# Altium PCB Standard 60 03.PcbDoc
Units mm, origin at the board's own origin, x right, y up, seen from the top; angles counter-clockwise.
Board outline 283.39 x 94.93 mm, 2 copper layers (Top Layer, Bottom Layer); 138 components, 95 nets, 541 pads, 27 vias.
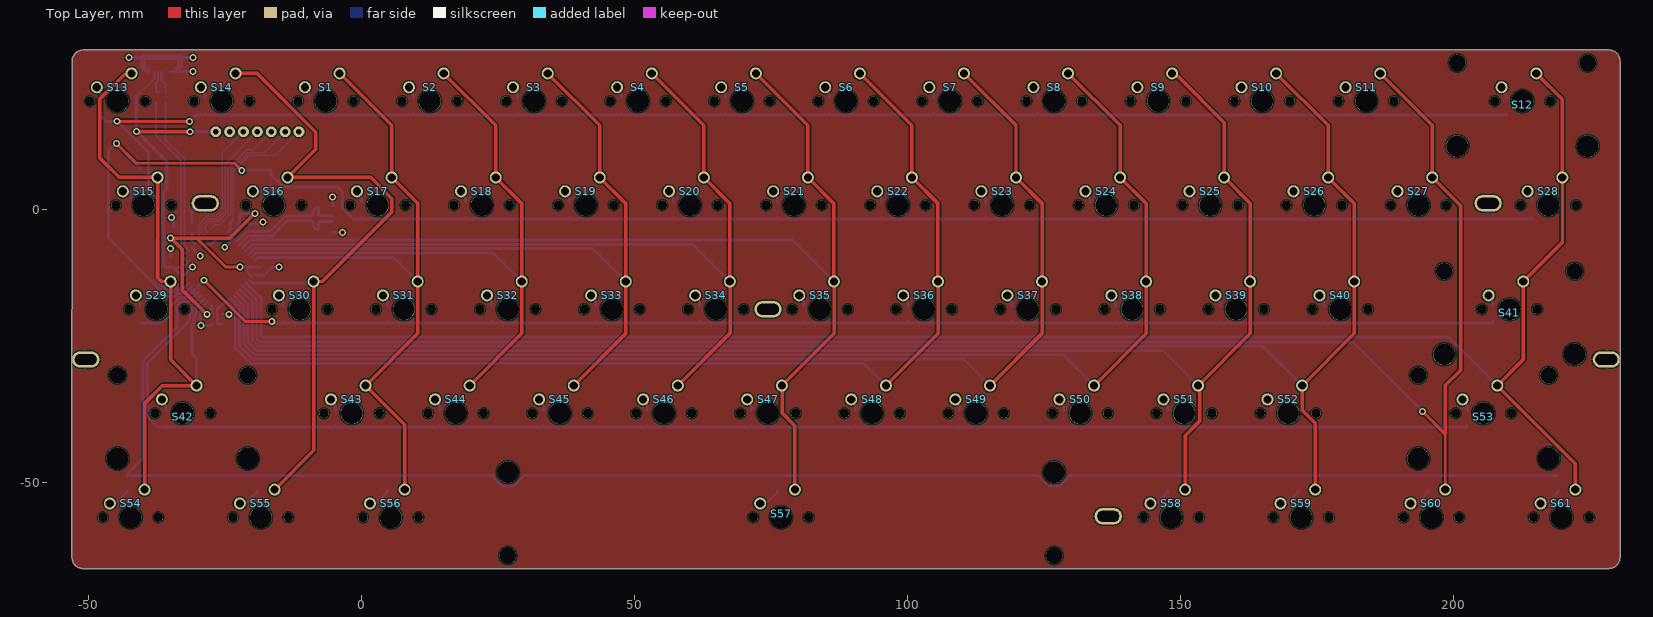
[diagram p0: Top Layer view]
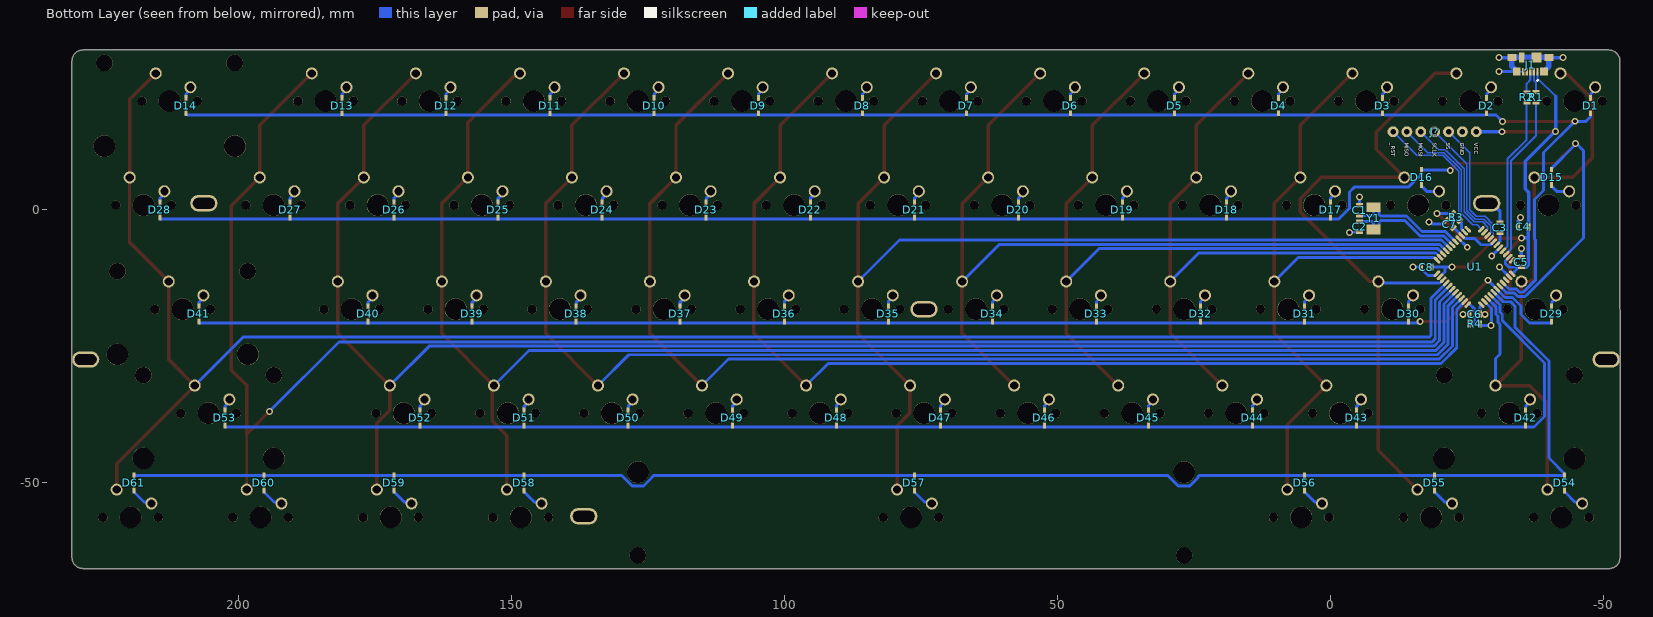
[diagram p1: Bottom Layer view, seen from below]

## Layer stack, top to bottom
Top Solder: solder mask 0.0102, Solder Resist, Dk 3.5
Top Layer: signal copper 0.0356
Dielectric 1: dielectric 0.32, FR-4, Dk 4.8
Bottom Layer: signal copper 0.0356
Bottom Solder: solder mask 0.0102, Solder Resist, Dk 3.5

## Board outline
-50.982,-65.677 cw(c-50.982,-63.677) -52.982,-63.676 -52.963,27.255 cw(c-50.963,27.254) -50.963,29.254 228.411,29.254 cw(c228.411,27.254) 230.411,27.254 230.411,-63.672 cw(c228.411,-63.672) 228.411,-65.672

## Design rules (kind name [scope] priority, off if disabled: settings)
Clearance [All] p1: gap=0.254 ignorepadtopadclearanceinfootprint=TRUE
ComponentClearance [All] p1: gap=0.254 collisioncheckmode=3 verticalgap=0.254 showdistances=FALSE donotcheckwithout3dbody=TRUE checkcomponentboundary=TRUE
DiffPairsRouting [All] p1: maxlimit=2.54 minlimit=0.254 mostfreqgap=0.381 toplayer_minwidth=0.254 toplayer_maxwidth=2.54 toplayer_prefwidth=0.381 bottomlayer_minwidth=0.254 bottomlayer_maxwidth=2.54 bottomlayer_prefwidth=0.381 maxuncoupledlength=12.7
PolygonConnect [All] p1: connectstyle=Relief reliefconductorwidth=0.254 reliefentries=4 polygonreliefangle="90 Angle" airgapwidth=0.254
RoutingVias [All] p1: holewidth=0.7 width=1.2 viastyle="Through Hole" minholewidth=0.5 minwidth=1 maxholewidth=1 maxwidth=1.5
SolderMaskExpansion [All] p1: expansion=0.102 istentingtop=FALSE
Width [All] p1: maxlimit=25.4 minlimit=0.254 preferedwidth=0.635
28 further rules are at their usual default settings.

## Classes and differential pairs
net class ROW[5..1]: ROW1 ROW2 ROW3 ROW4 ROW5
net class COL[14..1]: COL1 COL2 COL3 COL4 COL5 COL6 COL7 COL8 COL9 COL10 COL11 COL12 COL13 COL14
component class MCU: C1 C2 C3 C4 C5 C6 C7 C8 J1 J? R1 R2 R3 R4 U1 Y1
component class matrix: D1 D2 D3 D4 D5 D6 D7 D8 D9 D10 D11 D12 D13 D14 D15 D16 D17 D18 D19 D20 D21 D22 D23 D24 D25 D26 D27 D28 D29 D30 D31 D32 D33 D34 D35 D36 D37 D38 D39 D40 D41 D42 D43 D44 D45 D46 D47 D48 D49 D50 D51 D52 D53 D54 D55 D56 D57 D58 D59 D60 D61 S1 S2 S3 S4 S5 S6 S7 S8 S9 S10 S11 S12 S13 S14 S15 S16 S17 S18 S19 S20 S21 S22 S23 S24 S25 S26 S27 S28 S29 S30 S31 S32 S33 S34 S35 S36 S37 S38 S39 S40 S41 S42 S43 S44 S45 S46 S47 S48 S49 S50 S51 S52 S53 S54 S55 S56 S57 S58 S59 S60 S61
differential pair XT: +XT_P -XT_N
differential pair DP: +DP_P -DP_N
differential pair DP1: +DP1_P -DP1_N

## Components (designator, comment, footprint, x,y, rotation, side; value= is the part's Value field where it differs from the comment)
C1 "Cap" 0805 -5.323,-0.064 r270 bottom value=22pf
C2 "Cap" 0805 -5.323,-3.112 r90 bottom value=22pf
C3 "Cap" 0805 -31.011,-3.304 r270 bottom value=1uf
C4 "Cap" 0805 -35.286,-3.12 r180 bottom value=10uf
C5 "Cap" 0805 -34.946,-9.566 r270 bottom value=0.1uf
C6 "Cap" 0805 -26.387,-19.129 r180 bottom value=0.1uf
C7 "Cap" 0805 -21.797,-2.631 r225 bottom value=0.1uf
C8 "Cap" 0805 -17.504,-10.48 r180 bottom value=0.1uf
D1 "Diode" SOD-323F -47.625,19.05 r90 bottom
D2 "Diode" SOD-323F -28.575,19.05 r90 bottom
D3 "Diode" SOD-323F -9.525,19.05 r90 bottom
D4 "Diode" SOD-323F 9.525,19.05 r90 bottom
D5 "Diode" SOD-323F 28.575,19.05 r90 bottom
D6 "Diode" SOD-323F 47.625,19.05 r90 bottom
D7 "Diode" SOD-323F 66.675,19.05 r90 bottom
D8 "Diode" SOD-323F 85.725,19.05 r90 bottom
D9 "Diode" SOD-323F 104.775,19.05 r90 bottom
D10 "Diode" SOD-323F 123.825,19.05 r90 bottom
D11 "Diode" SOD-323F 142.875,19.05 r90 bottom
D12 "Diode" SOD-323F 161.925,19.05 r90 bottom
D13 "Diode" SOD-323F 180.975,19.05 r90 bottom
D14 "Diode" SOD-323F 209.55,19.05 r90 bottom
D15 "Diode" SOD-323F -40.481,5.953 r270 bottom
D16 "Diode" SOD-323F -16.669,5.953 r270 bottom
D17 "Diode" SOD-323F 0,0 r90 bottom
D18 "Diode" SOD-323F 19.05,0 r90 bottom
D19 "Diode" SOD-323F 38.1,0 r90 bottom
D20 "Diode" SOD-323F 57.15,0 r90 bottom
D21 "Diode" SOD-323F 76.2,0 r90 bottom
D22 "Diode" SOD-323F 95.25,0 r90 bottom
D23 "Diode" SOD-323F 114.3,0 r90 bottom
D24 "Diode" SOD-323F 133.35,0 r90 bottom
D25 "Diode" SOD-323F 152.4,0 r90 bottom
D26 "Diode" SOD-323F 171.45,0 r90 bottom
D27 "Diode" SOD-323F 190.5,0 r90 bottom
D28 "Diode" SOD-323F 214.312,0 r90 bottom
D29 "Diode" SOD-323F -40.481,-19.05 r90 bottom
D30 "Diode" SOD-323F -14.287,-19.05 r90 bottom
D31 "Diode" SOD-323F 4.763,-19.05 r90 bottom
D32 "Diode" SOD-323F 23.812,-19.05 r90 bottom
D33 "Diode" SOD-323F 42.863,-19.05 r90 bottom
D34 "Diode" SOD-323F 61.913,-19.05 r90 bottom
D35 "Diode" SOD-323F 80.963,-19.05 r90 bottom
D36 "Diode" SOD-323F 100.013,-19.05 r90 bottom
D37 "Diode" SOD-323F 119.062,-19.05 r90 bottom
D38 "Diode" SOD-323F 138.112,-19.05 r90 bottom
D39 "Diode" SOD-323F 157.162,-19.05 r90 bottom
D40 "Diode" SOD-323F 176.213,-19.05 r90 bottom
D41 "Diode" SOD-323F 207.169,-19.05 r90 bottom
D42 "Diode" SOD-323F -35.719,-38.1 r90 bottom
D43 "Diode" SOD-323F -4.763,-38.1 r90 bottom
D44 "Diode" SOD-323F 14.287,-38.1 r90 bottom
D45 "Diode" SOD-323F 33.337,-38.1 r90 bottom
D46 "Diode" SOD-323F 52.388,-38.1 r90 bottom
D47 "Diode" SOD-323F 71.438,-38.1 r90 bottom
D48 "Diode" SOD-323F 90.488,-38.1 r90 bottom
D49 "Diode" SOD-323F 109.537,-38.1 r90 bottom
D50 "Diode" SOD-323F 128.588,-38.1 r90 bottom
D51 "Diode" SOD-323F 147.637,-38.1 r90 bottom
D52 "Diode" SOD-323F 166.688,-38.1 r90 bottom
D53 "Diode" SOD-323F 202.406,-38.1 r90 bottom
D54 "Diode" SOD-323F -42.862,-50.006 r270 bottom
D55 "Diode" SOD-323F -19.05,-50.006 r270 bottom
D56 "Diode" SOD-323F 4.763,-50.006 r270 bottom
D57 "Diode" SOD-323F 76.2,-50.006 r270 bottom
D58 "Diode" SOD-323F 147.637,-50.006 r270 bottom
D59 "Diode" SOD-323F 171.45,-50.006 r270 bottom
D60 "Diode" SOD-323F 195.262,-50.006 r270 bottom
D61 "Diode" SOD-323F 219.075,-50.006 r270 bottom
J1 "Molex 473460001" "MOLEX 47346 0001" -36.575,27.541 r0 bottom locked
J? "ISP HEADER" "SPI HEADER" -26.67,14.287 r270 bottom
R1 "Res" 0805 -37.626,20.589 r270 bottom value=22
R2 "Res" 0805 -35.931,20.572 r270 bottom value=22
R3 "Res" 0805 -23.005,-1.33 r225 bottom value=10k
R4 "Res" 0805 -26.387,-20.907 r180 bottom value=10k
S1 "1u" MX1U -6.526,19.893 r0 top locked
S2 "1u" MX1U 12.523,19.893 r0 top locked
S3 "1u" MX1U 31.574,19.893 r0 top locked
S4 "1u" MX1U 50.624,19.893 r0 top locked
S5 "1u" MX1U 69.674,19.893 r0 top locked
S6 "1u" MX1U 88.724,19.893 r0 top locked
S7 "1u" MX1U 107.773,19.893 r0 top locked
S8 "1u" MX1U 126.824,19.893 r0 top locked
S9 "1u" MX1U 145.873,19.893 r0 top locked
S10 "1u" MX1U 164.924,19.893 r0 top locked
S11 "1u" MX1U 183.974,19.893 r0 top locked
S12 "2u" MX2U 212.548,19.893 r0 top locked
S13 "1u" MX1U -44.626,19.893 r0 top locked
S14 "1u" MX1U -25.576,19.893 r0 top locked
S15 "1u" MX1U -39.863,0.843 r0 top locked
S16 "1u" MX1U -16.052,0.843 r0 top locked
S17 "1u" MX1U 2.999,0.843 r0 top locked
S18 "1u" MX1U 22.049,0.843 r0 top locked
S19 "1u" MX1U 41.099,0.843 r0 top locked
S20 "1u" MX1U 60.148,0.843 r0 top locked
S21 "1u" MX1U 79.199,0.843 r0 top locked
S22 "1u" MX1U 98.248,0.843 r0 top locked
S23 "1u" MX1U 117.299,0.843 r0 top locked
S24 "1u" MX1U 136.349,0.843 r0 top locked
S25 "1u" MX1U 155.398,0.843 r0 top locked
S26 "1u" MX1U 174.449,0.843 r0 top locked
S27 "1u" MX1U 193.498,0.843 r0 top locked
S28 "1u" MX1U 217.31,0.843 r0 top locked
S29 "1u" MX1U -37.482,-18.208 r0 top locked
S30 "1u" MX1U -11.288,-18.208 r0 top locked
S31 "1u" MX1U 7.76,-18.208 r0 top locked
S32 "1u" MX1U 26.81,-18.208 r0 top locked
S33 "1u" MX1U 45.861,-18.208 r0 top locked
S34 "1u" MX1U 64.91,-18.208 r0 top locked
S35 "1u" MX1U 83.96,-18.208 r0 top locked
S36 "1u" MX1U 103.01,-18.208 r0 top locked
S37 "1u" MX1U 122.062,-18.208 r0 top locked
S38 "1u" MX1U 141.11,-18.208 r0 top locked
S39 "1u" MX1U 160.162,-18.208 r0 top locked
S40 "1u" MX1U 179.212,-18.208 r0 top locked
S41 "2u" MX2U 210.166,-18.208 r0 top locked
S42 "2u" MX2U -32.721,-37.257 r0 top locked
S43 "1u" MX1U -1.763,-37.257 r0 top locked
S44 "1u" MX1U 17.287,-37.257 r0 top locked
S45 "1u" MX1U 36.337,-37.257 r0 top locked
S46 "1u" MX1U 55.385,-37.257 r0 top locked
S47 "1u" MX1U 74.437,-37.257 r0 top locked
S48 "1u" MX1U 93.485,-37.257 r0 top locked
S49 "1u" MX1U 112.537,-37.257 r0 top locked
S50 "1u" MX1U 131.587,-37.257 r0 top locked
S51 "1u" MX1U 150.635,-37.257 r0 top locked
S52 "1u" MX1U 169.687,-37.257 r0 top locked
S53 "2u" MX2U 205.404,-37.257 r0 top locked
S54 "1u" MX1U -42.245,-56.307 r0 top locked
S55 "1u" MX1U -18.433,-56.307 r0 top locked
S56 "1u" MX1U 5.38,-56.307 r0 top locked
S57 "6.25u" "MX6.25U FLIPPED STAB" 76.818,-56.307 r0 top locked
S58 "1u" MX1U 148.254,-56.307 r0 top locked
S59 "1u" MX1U 172.068,-56.307 r0 top locked
S60 "1u" MX1U 195.879,-56.307 r0 top locked
S61 "1u" MX1U 219.692,-56.307 r0 top locked
U1 "ATmega32U4" TQFP44 -26.366,-10.462 r315 bottom locked
Y1 "XTAL" ABM3 -7.863,-1.588 r270 bottom value=16MHz

## Footprints (in the part's own frame and the unit in brackets; to place one, negate y for a bottom-side part, rotate by r counter-clockwise, add the part's x,y. Pads: shape width x height; smd on the part's side, far side on the other; paste and mask are expansions set on the pad)
0805 [mil]
  rect 28x51 smd: 1(-37.5,0) 2(37.5,0)
ABM3 [mil] "ABRACON SMD XTAL PACKAGE"
  rect 70x100 smd: 1(-80,0) 2(80,0)
"MOLEX 47346 0001" [mm]
  rect 0.45x1.38 smd paste+0 mask+0: 1(-1.3,2.31) 2(-0.65,2.31) 3(0,2.31) 4(0.65,2.31) 5(1.3,2.31)
  rect 1.425x1.55 smd paste+0 mask+0: 6(-2.488,2.225) 7(2.488,2.225)
  rect 1.65x1.3 smd paste+0 mask+0: 8(-3.375,-0.35) 11(3.375,-0.35)
  rect 1.8x1.9 smd paste+0 mask+0: 9(-1.15,-0.35)
  rect 1x1.9 smd paste+0 mask+0: 10(1.55,-0.35)
  silkscreen extent -1.45,3.73 -1.2,3.97
MX1U [mm]
  round 2.2 hole 1.5: 1(2.54,5.08) 2(-3.81,2.54)
  round 1.7 hole 1.7 unplated: ""(-5.08,0) ""(5.08,0)
  round 4 hole 4 unplated: ""(0,0)
MX2U [mil]
  round 86.61 hole 59.06: 1(100,200) 2(-150,100)
  round 157 hole 157 unplated: ""(-470,-325) ""(470,-325)
  round 120 hole 120 unplated: ""(-470,275) ""(470,275)
  round 66.93 hole 66.93 unplated: ""(-200,0) ""(200,0)
  round 157.48 hole 157.48 unplated: ""(0,0)
"MX6.25U FLIPPED STAB" [mm]
  round 2.2 hole 1.5: 1(2.54,5.08) 2(-3.81,2.54)
  round 3.048 hole 3.048 unplated: ""(-50,-6.985) ""(50,-6.985)
  round 3.988 hole 3.988 unplated: ""(-50,8.255) ""(50,8.255)
  round 1.7 hole 1.7 unplated: ""(-5.08,0) ""(5.08,0)
  round 4 hole 4 unplated: ""(0,0)
SOD-323F [mm]
  rect 1.05x0.55 smd: 1(-1.4,0) 2(1.4,0)
"SPI HEADER" [mm]
  round 2 hole 1: 1(0,0) 2(0,-2.54) 3(0,-5.08) 4(0,-7.62) 5(0,-10.16) 6(0,-12.7) 7(0,-15.24)
TQFP44 [mm] "TQFP, 44-Leads, Body 10.00x10.00mm"
  oval 1.5x0.55 smd: 1(-5.75,4) 2(-5.75,3.2) 3(-5.75,2.4) 4(-5.75,1.6) 5(-5.75,0.8) 6(-5.75,0) 7(-5.75,-0.8) 8(-5.75,-1.6) 9(-5.75,-2.4) 10(-5.75,-3.2) 11(-5.75,-4) 23(5.75,-4) 24(5.75,-3.2) 25(5.75,-2.4) 26(5.75,-1.6) 27(5.75,-0.8) 28(5.75,0) 29(5.75,0.8) 30(5.75,1.6) 31(5.75,2.4) 32(5.75,3.2) 33(5.75,4)
  oval 0.55x1.5 smd: 12(-4,-5.75) 13(-3.2,-5.75) 14(-2.4,-5.75) 15(-1.6,-5.75) 16(-0.8,-5.75) 17(0,-5.75) 18(0.8,-5.75) 19(1.6,-5.75) 20(2.4,-5.75) 21(3.2,-5.75) 22(4,-5.75) 34(4,5.75) 35(3.2,5.75) 36(2.4,5.75) 37(1.6,5.75) 38(0.8,5.75) 39(0,5.75) 40(-0.8,5.75) 41(-1.6,5.75) 42(-2.4,5.75) 43(-3.2,5.75) 44(-4,5.75)
  silkscreen extent -5.87,4.7 -5.63,4.95

## Part data
C1 C2 C3 C4 C5 C6 C7 C8: "Capacitor"
J1: "Micro usb receptacle"
R1 R2 R3 R4: "Resistor"
  R1: LatestRevisionDate=17-Jul-2002, LatestRevisionNote="Re-released for DXP Platform.", PackageDescription="Axial Device, Thru-Hole; 2 Leads; 0.4 in Pin Spacing", PackageReference=AXIAL-0.4, Published=8-Jun-2000, Publisher="Altium Limited"
S1 S2 S3 S4 S5 S6 S7 S8 S9 S10 S11 S13 S14 S15 S16 S17 S18 S19 S20 S21 S22 S23 S24 S25 S26 S27 S28 S29 S30 S31 S32 S33 S34 S35 S36 S37 S38 S39 S40 S43 S44 S45 S46 S47 S48 S49 S50 S51 S52 S54 S55 S56 S58 S59 S60 S61: "1-2u Mx Switch"
S12 S41 S42 S53: "2-3u Mx Switch with pcb mount stabs"
S57: "6.25u Mx Switch with pcb mount stabs"
U1: "8-bit AVR Microcontroller", Manufacturer="Microchip / Atmel", Manufacturer Part Number=ATMEGA32U4-AU, ComponentLink1Description="Manufacturer URL", ComponentLink1URL=http://www.atmel.com/, ComponentLink2Description="ATmega16U4/32U4 Datasheet", ComponentLink2URL=http://www.atmel.com/dyn/resources/prod_documents/doc7766.pdf, ComponentLink3Description="ATmega16U4 ATmega32U4 Summary", ComponentLink3URL=http://www.atmel.com/dyn/resources/prod_documents/7766S.pdf, DatasheetVersion="revF, Nov-2010", PackageDescription="44-Pin Plastic Thin Quad Flat Pack, 10 x 10 x 1.0 mm Body, 0.8 mm Pitch (TQFP)", PackageReference=44ML, PackageVersion="rev.G, Jul-2007", RevisionNote="DatasheetVersion updated. URLs added."
Y1: "Crystal Oscillator"

## Free pads (board coordinates)
  oval 5x3 hole 2 slot 4 at 0 deg: 3(206.274,1.191) 4(227.911,-27.407) 5(136.723,-56.108) 6(74.436,-18.21) 7(-50.463,-27.408) 8(-28.575,1.191)

## Via types
v1: diameter 1.27, hole 0.711, Top Layer to Bottom Layer, 27 vias

## Nets (pads, with @x,y where several pads share a name; then routed paths per layer and width w, separated by ;. In a path a pad name is that pad's centre, name@x,y a point inside that pad or via, vN(x,y) a via of type N, cw(c..) or ccw(c..) an arc to the next point about the centre after c; other vN are vias at no path point)
\R\E\S\E\T\: J?.7 R3.2 U1.13 | length 26.7
  Bottom Layer w0.254: R3.2@-23.739,-2.029 -23.419,-1.709 -23.419,-0.611 -23.422,-0.608 -23.422,7.079 -20.537,9.964 -15.753,9.964 J?.7
  Bottom Layer w0.533: U1.13@-24.527,-4.098 -24.527,-4.094 -24.218,-3.785 -24.218,-3.783 -23.996,-3.562 -23.996,-2.321 -23.742,-2.066 R3.2
COL1: S13.1 S15.1 S29.1 S42.1 S54.1 U1.36 | length 116.4
  Top Layer w0.635: S13.1 -42.354,24.705 -43.451,24.705 -47.879,20.277 -47.879,9.478 -44.323,5.923 S15.1 -37.323,1.939 -37.292,1.908 -37.292,-12.418 -36.582,-13.128 S29.1 ; S54.1 -39.705,-35.457 -36.426,-32.177 S42.1 -34.91,-27.448 S29.1@-34.91,-13.16
  Bottom Layer w0.533: S42.1 -30.181,-27.25 -31.001,-26.43 -31.001,-20.972 -30.632,-20.604 -30.632,-19.491 -30.291,-19.149 -30.244,-19.102 -30.244,-18.277 -30.244,-17.735 U1.36
COL2: S14.1 S16.1 S30.1 S55.1 U1.25 | length 125.6
  Top Layer w0.635: S14.1 -19.107,24.973 -8.364,14.23 -8.364,11.07 -13.297,6.138 S16.1 1.68,5.923 5.57,2.032 5.57,-0.399 -7.159,-13.128 S30.1 -8.717,-13.16 -8.717,-44.051 S55.1
  Bottom Layer w0.533: U1.25 -20.037,-13.397 -9.017,-13.397 S30.1
COL3: S1.1 S17.1 S31.1 S43.1 S56.1 U1.22 | length 120.9
  Top Layer w0.635: S1.1 5.539,15.448 S17.1 ; S17.1@5.559,5.943 10.3,1.202 S31.1 10.331,-13.16 10.331,-22.623 S43.1 7.92,-39.32 S56.1
  Bottom Layer w0.533: U1.22 -18.944,-8.698 5.869,-8.698 S31.1
COL4: S2.1 S18.1 S32.1 S44.1 U1.21 | length 118.8
  Top Layer w0.635: S2.1@15.094,24.941 24.589,15.447 S18.1 ; S44.1 29.382,-22.622 29.382,-13.16 S32.1 29.35,1.161 S18.1@24.62,5.891
  Bottom Layer w0.533: U1.21 -19.288,-7.91 24.133,-7.91 S32.1
COL5: S3.1 S19.1 S33.1 S45.1 U1.20 | length 138.8
  Top Layer w0.635: S3.1@34.145,24.941 43.639,15.447 S19.1 ; S45.1 48.432,-22.622 48.432,-13.16 S33.1 48.401,1.161 S19.1@43.67,5.891
  Bottom Layer w0.533: U1.20 -19.632,-7.123 42.395,-7.123 S33.1
COL6: S4.1 S20.1 S34.1 S46.1 U1.19 | length 159
  Top Layer w0.635: S4.1 62.688,15.449 S20.1 67.45,1.16 S34.1 67.482,-13.16 67.482,-22.621 S46.1
  Bottom Layer w0.533: U1.19 -19.976,-6.335 60.658,-6.335 S34.1
COL7: S5.1 S21.1 S35.1 S47.1 S57.1 U1.18 | length 199
  Top Layer w0.635: S5.1 81.739,15.448 S21.1 86.5,1.161 S35.1 86.532,-13.16 86.532,-22.622 S47.1 77.008,-32.209 77.008,-37.194 79.358,-39.544 S57.1
  Bottom Layer w0.533: U1.18 -20.32,-5.548 78.92,-5.548 S35.1
COL8: S6.1 S22.1 S36.1 S48.1 U1.32 | length 198
  Top Layer w0.635: S6.1@91.295,24.941 100.788,15.449 S22.1 ; S48.1 105.582,-22.621 105.582,-13.16 S36.1 105.55,1.16 S22.1@100.819,5.891
  Bottom Layer w0.533: U1.32 -23.101,-18.252 -23.101,-25.238 -20.224,-28.115 91.963,-28.115 S48.1
COL9: S7.1 S23.1 S37.1 S49.1 U1.31 | length 216.6
  Top Layer w0.635: S7.1@110.712,24.68 110.712,24.573 119.839,15.447 S23.1 ; S49.1 124.602,-22.652 124.602,-19.305 124.633,-19.273 124.633,-17.143 124.602,-17.111 S37.1 124.602,1.16 119.892,5.869 S23.1@119.892,6.137
  Bottom Layer w0.533: U1.31 -22.314,-17.908 -22.314,-24.912 -19.898,-27.328 110.227,-27.328 S49.1
COL10: S8.1 S24.1 S38.1 S50.1 U1.30 | length 235.5
  Top Layer w0.635: S8.1@129.395,24.941 138.889,15.448 S24.1 ; S50.1 143.682,-22.622 143.682,-13.16 S38.1 143.65,1.161 S24.1@138.92,5.891
  Bottom Layer w0.533: U1.30 -21.526,-17.564 -21.526,-24.586 -19.572,-26.541 128.49,-26.541 S50.1
COL11: S9.1 S25.1 S39.1 S51.1 S58.1 U1.29 | length 274.8
  Top Layer w0.635: S9.1 148.836,24.973 149.394,24.415 149.488,24.415 157.938,15.966 S25.1 162.702,1.159 S39.1 162.733,-13.16 162.733,-22.62 S51.1 153.439,-32.441 153.439,-38.71 150.794,-41.355 S58.1
  Bottom Layer w0.533: U1.29 -20.739,-17.22 -20.739,-24.26 -19.245,-25.753 146.751,-25.753 S51.1
COL12: S10.1 S26.1 S40.1 S52.1 S59.1 U1.28 | length 292.6
  Top Layer w0.635: S10.1@167.495,24.941 176.989,15.448 S26.1 ; S59.1 174.608,-39.109 172.227,-36.728 S52.1 181.783,-22.621 181.783,-13.16 S40.1 181.752,1.16 S26.1@177.288,5.623
  Bottom Layer w0.533: U1.28 -19.952,-16.876 -19.952,-23.933 -18.919,-24.966 165.015,-24.966 S52.1
COL13: S11.1 S27.1 S60.1 U1.27 | length 319
  Top Layer w0.533: v1(194.242,-36.897) 198.419,-41.074 S60.1
  Top Layer w0.635: S11.1 196.038,15.449 S27.1 201.233,0.728 201.233,-29.344 198.419,-32.157 198.419,-41.074
  Bottom Layer w0.533: U1.27 -19.164,-16.532 -19.164,-23.607 -18.593,-24.178 181.523,-24.178 v1(194.242,-36.897)
COL14: S12.1 S28.1 S41.1 S53.1 S61.1 U1.26 | length 329.9
  Top Layer w0.635: S12.1@215.119,24.941 219.85,20.21 S28.1 219.882,5.891 219.882,-5.952 S41.1 212.737,-13.16 212.737,-27.384 S53.1 222.232,-46.465 S61.1
  Bottom Layer w0.533: U1.26 -18.377,-16.188 -18.377,-23.005 -18.064,-23.318 199.085,-23.318 S53.1
DP1_N: R1.2 U1.3 | length 30
  Bottom Layer w0.381: R1.2 -37.626,13.595 -33.02,8.989 -33.02,-7.202 U1.3
DP1_P: R2.2 U1.4 | length 28.9
  Bottom Layer w0.381: R2.2@-35.901,19.618 -35.901,12.847 -32.385,9.331 -32.385,-6.705 U1.4
DP_N: J1.2 R1.1 | length 4
  Bottom Layer w0.381: R1.1 -37.626,23.297 -37.217,23.705 -37.217,25.223 J1.2 ; R1.1@-37.33,21.545 R1.1@-37.221,21.654
DP_P: J1.3 R2.1 | length 4
  Bottom Layer w0.381: J1.3@-36.582,25.223 J1.3 -36.543,25.199 -36.543,23.751 -35.901,23.108 R2.1@-35.901,21.523
GND: C1.1 C2.1 C3.1 C4.1 C5.1 C6.1 C7.1 C8.1 J1.5 J1.6 J1.7 J1.8 J1.9 J1.10 J1.11 J?.2 pad.3 pad.4 pad.5 pad.6 pad.7 pad.8 R4.2 U1.5 U1.15 U1.23 U1.35 U1.43 | length 59.7
  Bottom Layer w0.254: J1.5 -35.19,25.316 J1.7
  Bottom Layer w0.533: U1.43 v1(-30.922,-10.493) ; U1.5 v1(-29.498,-8.461) ; U1.35 -29.456,-18.079 -29.456,-19.428 -29.503,-19.475 -29.503,-19.608 -29.456,-19.655 -29.456,-21.042 v1(-29.337,-21.161) -27.429,-21.161 -27.34,-21.072 R4.2 ; C6.1 v1(-24.257,-19.129) ; v1(-25.019,-6.853) U1.15 ; C7.1 -20.477,-2.604 -18.57,-2.604 -18.234,-2.268 v1(-18.034,-2.268) ; U1.23 -19.135,-12.036 -17.814,-12.036 -16.551,-10.772 C8.1 v1(-15.071,-10.48) ; C2.1 -5.284,-4.104 -3.468,-4.104 v1(-3.429,-4.143) ; v1(-5.323,2.344) C1.1 -5.235,0.799 C1.1@-4.942,0.799
  Bottom Layer w0.635: v1(-42.545,27.861) -42.53,27.876 -39.965,27.876 J1.8 ; J1.6 J1.6@-39.062,25.378 ; C5.1 v1(-34.946,-7.089) ; v1(-34.788,-1.421) -34.788,-1.592 -34.333,-2.047 C4.1 ; J1.7@-34.087,25.378 J1.7 -30.866,25.316 v1(-30.861,25.321) ; J1.11 -33.185,27.876 -30.876,27.876 v1(-30.861,27.861) ; C3.1 -31.011,-0.245 -29.575,1.191 pad.8 pad.8@-29.4,0.366
  Bottom Layer w1.016: J1.6@-39.062,25.378 -39.95,26.266 J1.8 J1.9 J1.10 J1.11 -33.2,26.266 J1.7@-34.087,25.378
HWB: R4.1 U1.33 | length 5.3
  Bottom Layer w0.533: R4.1 -26.239,-20.907 -26.387,-20.758 -26.387,-18.223 -25.33,-17.166 -25.319,-17.166 U1.33
MISO: J?.6 U1.11 | length 25.7
  Bottom Layer w0.254: U1.11@-27.625,-3.528 -26.82,-2.722 -26.052,-2.722 -23.93,-0.601 -23.93,7.29 -20.748,10.472 -17.785,10.472 J?.6
MOSI: J?.5 U1.10 | length 25.3
  Bottom Layer w0.254: U1.10@-28.191,-4.112 -28.793,-3.51 -28.793,-3.158 -27.849,-2.214 -26.262,-2.214 -24.438,-0.39 -24.438,7.5 -20.958,10.98 -19.817,10.98 J?.5
NetD1_2: D1.2 S13.2 | length 2.3
  Bottom Layer w0.533: S13.2 -48.436,21.982 -47.633,21.178 -47.633,20.458 D1.2
NetD2_2: D2.2 S14.2 | length 2.3
  Bottom Layer w0.533: S14.2 -29.386,21.982 -28.583,21.179 -28.583,20.458 D2.2
NetD3_2: D3.2 S1.2 | length 2.3
  Bottom Layer w0.533: S1.2 -10.336,21.982 -9.533,21.179 -9.533,20.458 D3.2
NetD4_2: D4.2 S2.2 | length 2.3
  Bottom Layer w0.533: S2.2 8.713,21.982 9.517,21.178 9.517,20.458 D4.2
NetD5_2: D5.2 S3.2 | length 2.3
  Bottom Layer w0.533: S3.2 27.764,21.982 28.567,21.179 28.567,20.458 D5.2
NetD6_2: D6.2 S4.2 | length 2.3
  Bottom Layer w0.533: S4.2 46.814,21.982 47.617,21.179 47.617,20.458 D6.2
NetD7_2: D7.2 S5.2 | length 2.3
  Bottom Layer w0.533: S5.2 65.864,21.982 66.667,21.179 66.667,20.458 D7.2
NetD8_2: D8.2 S6.2 | length 2.3
  Bottom Layer w0.533: S6.2 84.914,21.982 85.717,21.179 85.717,20.458 D8.2
NetD9_2: D9.2 S7.2 | length 2.3
  Bottom Layer w0.533: S7.2 103.963,21.982 104.767,21.178 104.767,20.458 D9.2
NetD10_2: D10.2 S8.2 | length 2.3
  Bottom Layer w0.533: S8.2 123.014,21.982 123.817,21.179 123.817,20.458 D10.2
NetD11_2: D11.2 S9.2 | length 2.3
  Bottom Layer w0.533: S9.2 142.063,21.982 142.867,21.178 142.867,20.458 D11.2
NetD12_2: D12.2 S10.2 | length 2.3
  Bottom Layer w0.533: S10.2 161.114,21.982 161.917,21.179 161.917,20.458 D12.2
NetD13_2: D13.2 S11.2 | length 2.3
  Bottom Layer w0.533: S11.2 180.164,21.982 180.967,21.179 180.967,20.458 D13.2
NetD14_2: D14.2 S12.2 | length 2.3
  Bottom Layer w0.533: S12.2 208.738,21.982 209.542,21.178 209.542,20.458 D14.2
NetD15_2: D15.2 S15.2 | length 3.8
  Bottom Layer w0.533: S15.2 -41.402,3.383 -40.481,4.303 D15.2
NetD16_2: D16.2 S16.2 | length 3.8
  Bottom Layer w0.533: S16.2 -17.589,3.383 -16.669,4.303 D16.2
NetD17_2: D17.2 S17.2 | length 2.3
  Bottom Layer w0.533: S17.2 -0.811,2.932 -0.008,2.129 -0.008,1.408 D17.2
NetD18_2: D18.2 S18.2 | length 2.3
  Bottom Layer w0.533: S18.2 18.239,2.932 19.042,2.129 19.042,1.408 D18.2
NetD19_2: D19.2 S19.2 | length 2.3
  Bottom Layer w0.533: S19.2 37.289,2.932 38.092,2.129 38.092,1.408 D19.2
NetD20_2: D20.2 S20.2 | length 2.3
  Bottom Layer w0.533: S20.2 56.338,2.932 57.142,2.128 57.142,1.408 D20.2
NetD21_2: D21.2 S21.2 | length 2.3
  Bottom Layer w0.533: S21.2 75.389,2.932 76.192,2.129 76.192,1.408 D21.2
NetD22_2: D22.2 S22.2 | length 2.3
  Bottom Layer w0.533: S22.2 94.438,2.932 95.242,2.128 95.242,1.408 D22.2
NetD23_2: D23.2 S23.2 | length 2.3
  Bottom Layer w0.533: S23.2 113.489,2.932 114.292,2.129 114.292,1.408 D23.2
NetD24_2: D24.2 S24.2 | length 2.3
  Bottom Layer w0.533: S24.2 132.539,2.932 133.342,2.129 133.342,1.408 D24.2
NetD25_2: D25.2 S25.2 | length 2.3
  Bottom Layer w0.533: S25.2 151.588,2.932 152.392,2.128 152.392,1.408 D25.2
NetD26_2: D26.2 S26.2 | length 2.3
  Bottom Layer w0.533: S26.2 170.639,2.932 171.442,2.129 171.442,1.408 D26.2
NetD27_2: D27.2 S27.2 | length 2.3
  Bottom Layer w0.533: S27.2 189.688,2.932 190.492,2.128 190.492,1.408 D27.2
NetD28_2: D28.2 S28.2 | length 2.3
  Bottom Layer w0.533: S28.2 213.5,2.932 214.304,2.128 214.304,1.408 D28.2
NetD29_2: D29.2 S29.2 | length 2.3
  Bottom Layer w0.533: S29.2 -41.292,-16.119 -40.49,-16.922 -40.49,-17.642 D29.2
NetD30_2: D30.2 S30.2 | length 2.3
  Bottom Layer w0.533: S30.2 -15.098,-15.996 -14.287,-16.807 D30.2 D30.2@-14.296,-17.642
NetD31_2: D31.2 S31.2 | length 2.3
  Bottom Layer w0.533: S31.2 3.95,-15.992 4.763,-16.805 D31.2
NetD32_2: D32.2 S32.2 | length 2.3
  Bottom Layer w0.533: S32.2 23,-15.994 23.812,-16.806 D32.2
NetD33_2: D33.2 S33.2 | length 2.3
  Bottom Layer w0.533: S33.2 42.051,-15.994 42.863,-16.806 D33.2
NetD34_2: D34.2 S34.2 | length 2.3
  Bottom Layer w0.533: S34.2 61.1,-15.993 61.913,-16.805 D34.2
NetD35_2: D35.2 S35.2 | length 2.3
  Bottom Layer w0.533: S35.2 80.15,-15.993 80.963,-16.805 D35.2
NetD36_2: D36.2 S36.2 | length 2.3
  Bottom Layer w0.533: S36.2 99.2,-15.993 100.013,-16.805 D36.2
NetD37_2: D37.2 S37.2 | length 2.3
  Bottom Layer w0.635: S37.2 118.252,-16.092 119.02,-16.86 119.02,-17.608 D37.2
NetD38_2: D38.2 S38.2 | length 2.3
  Bottom Layer w0.533: S38.2 137.3,-16.119 138.104,-16.923 138.104,-17.642 D38.2
NetD39_2: D39.2 S39.2 | length 2.3
  Bottom Layer w0.533: S39.2 156.352,-16.119 157.154,-16.922 157.154,-17.642 D39.2
NetD40_2: D40.2 S40.2 | length 2.3
  Bottom Layer w0.533: S40.2 175.402,-16.119 176.204,-16.922 176.204,-17.642 D40.2
NetD41_2: D41.2 S41.2 | length 2.3
  Bottom Layer w0.533: S41.2 206.356,-16.119 207.16,-16.924 207.16,-17.642 D41.2
NetD42_2: D42.2 S42.2 | length 2.3
  Bottom Layer w0.533: S42.2 -36.531,-35.168 -35.727,-35.972 -35.727,-36.692 D42.2
NetD43_2: D43.2 S43.2 | length 2.3
  Bottom Layer w0.533: S43.2 -5.573,-35.168 -4.771,-35.971 -4.771,-36.692 D43.2
NetD44_2: D44.2 S44.2 | length 2.3
  Bottom Layer w0.533: S44.2 13.477,-35.046 14.287,-35.856 D44.2
NetD45_2: D45.2 S45.2 | length 2.3
  Bottom Layer w0.533: S45.2 32.527,-35.046 33.337,-35.856 D45.2
NetD46_2: D46.2 S46.2 | length 2.3
  Bottom Layer w0.533: S46.2 51.575,-35.043 52.388,-35.855 D46.2
NetD47_2: D47.2 S47.2 | length 2.3
  Bottom Layer w0.533: S47.2 70.627,-35.046 71.438,-35.856 D47.2
NetD48_2: D48.2 S48.2 | length 2.3
  Bottom Layer w0.533: S48.2 89.675,-35.043 90.488,-35.855 D48.2
NetD49_2: D49.2 S49.2 | length 2.3
  Bottom Layer w0.533: S49.2 108.727,-35.168 109.529,-35.971 109.529,-36.692 D49.2
NetD50_2: D50.2 S50.2 | length 2.3
  Bottom Layer w0.533: S50.2 127.777,-35.168 128.579,-35.971 128.579,-36.692 D50.2
NetD51_2: D51.2 S51.2 | length 2.3
  Bottom Layer w0.533: S51.2 146.825,-35.168 147.629,-35.972 147.629,-36.692 D51.2
NetD52_2: D52.2 S52.2 | length 2.3
  Bottom Layer w0.533: S52.2 165.877,-35.168 166.679,-35.971 166.679,-36.692 D52.2
NetD53_2: D53.2 S53.2 | length 2.3
  Bottom Layer w0.533: S53.2 201.594,-35.168 202.398,-35.972 202.398,-36.692 D53.2
NetD54_2: D54.2 S54.2 | length 4.3
  Bottom Layer w0.533: S54.2 -45.778,-53.491 -44.712,-53.491 -42.885,-51.665 -42.871,-51.665 -42.862,-51.656 D54.2
NetD55_2: D55.2 S55.2 | length 4.3
  Bottom Layer w0.533: S55.2 -21.967,-53.491 -20.9,-53.491 -19.074,-51.665 -19.058,-51.665 -19.05,-51.656 D55.2
NetD56_2: D56.2 S56.2 | length 4.3
  Bottom Layer w0.533: S56.2 1.847,-53.491 2.913,-53.491 4.74,-51.665 4.754,-51.665 4.763,-51.656 D56.2
NetD57_2: D57.2 S57.2 | length 4.3
  Bottom Layer w0.533: S57.2 73.285,-53.491 74.351,-53.491 76.178,-51.665 76.192,-51.665 76.2,-51.656 D57.2
NetD58_2: D58.2 S58.2 | length 4.3
  Bottom Layer w0.533: S58.2 144.721,-53.491 145.788,-53.491 147.614,-51.665 147.629,-51.665 147.637,-51.656 D58.2
NetD59_2: D59.2 S59.2 | length 4.3
  Bottom Layer w0.533: S59.2 168.535,-53.491 169.601,-53.491 171.428,-51.665 171.442,-51.665 171.45,-51.656 D59.2
NetD60_2: D60.2 S60.2 | length 4.3
  Bottom Layer w0.533: S60.2 192.346,-53.491 193.413,-53.491 195.239,-51.665 195.254,-51.665 195.262,-51.656 D60.2
NetD61_2: D61.2 S61.2 | length 4.3
  Bottom Layer w0.533: S61.2 216.159,-53.491 217.225,-53.491 219.052,-51.665 219.067,-51.665 219.075,-51.656 D61.2
ROW1: D1.1 D2.1 D3.1 D4.1 D5.1 D6.1 D7.1 D8.1 D9.1 D10.1 D11.1 D12.1 D13.1 D14.1 U1.41 | length 301.6
  Top Layer w0.533: v1(-44.729,16.212) -44.715,16.198 v1(-31.437,16.197)
  Bottom Layer w0.533: D1.1 -47.625,17.087 -46.737,16.199 -44.743,16.199 v1(-44.729,16.212) -38.993,10.475 -38.993,3.537 -37.343,1.887 -37.343,-5.368 -37.541,-5.566 -37.541,-12.821 -35.272,-15.09 -34.605,-15.09 -33.99,-14.475 -32.641,-14.475 U1.41 ; v1(-31.437,16.197) -30.262,17.372 -28.896,17.372 -28.876,17.392 -28.583,17.392 -28.575,17.4 D2.1 ; -28.274,17.392 -28.254,17.372 -9.846,17.372 -9.826,17.392 -9.533,17.392 D3.1@-9.525,17.4 ; D3.1 D3.1@-9.525,17.4 ; D4.1 D4.1@9.525,17.4 ; D5.1 D5.1@28.575,17.4 ; D6.1 D6.1@47.625,17.4 ; D7.1 D7.1@66.675,17.4 ; D8.1 D8.1@85.725,17.4 ; D9.1 D9.1@104.775,17.4 ; D10.1 D10.1@123.825,17.4 ; D11.1 D11.1@142.875,17.4 ; D12.1 D12.1@161.925,17.4 ; D13.1 D13.1@180.975,17.4 ; D14.1 209.55,17.4 209.542,17.392 209.249,17.392 209.229,17.372 181.296,17.372 181.276,17.392 180.983,17.392 D13.1@180.975,17.4 ; D3.1@-9.525,17.4 -9.517,17.392 -9.224,17.392 -9.204,17.372 9.204,17.372 9.224,17.392 9.517,17.392 D4.1@9.525,17.4 ; D4.1@9.525,17.4 9.533,17.392 9.826,17.392 9.846,17.372 28.547,17.372 D5.1@28.575,17.4 ; D5.1@28.575,17.4 28.583,17.392 28.876,17.392 28.896,17.372 47.304,17.372 47.324,17.392 47.617,17.392 D6.1@47.625,17.4 ; D6.1@47.625,17.4 47.633,17.392 47.926,17.392 47.946,17.372 66.354,17.372 66.374,17.392 66.667,17.392 D7.1@66.675,17.4 ; D7.1@66.675,17.4 66.683,17.392 66.976,17.392 66.996,17.372 85.404,17.372 85.424,17.392 85.717,17.392 D8.1@85.725,17.4 ; D8.1@85.725,17.4 85.733,17.392 86.026,17.392 86.046,17.372 104.454,17.372 104.474,17.392 104.767,17.392 D9.1@104.775,17.4 ; D9.1@104.775,17.4 104.783,17.392 105.076,17.392 105.096,17.372 123.504,17.372 123.524,17.392 123.817,17.392 D10.1@123.825,17.4 ; D10.1@123.825,17.4 123.833,17.392 124.126,17.392 124.146,17.372 142.847,17.372 D11.1@142.875,17.4 ; D11.1@142.875,17.4 142.883,17.392 143.176,17.392 143.196,17.372 161.604,17.372 161.624,17.392 161.917,17.392 D12.1@161.925,17.4 ; D12.1@161.925,17.4 161.933,17.392 162.226,17.392 162.246,17.372 180.654,17.372 180.674,17.392 180.967,17.392 D13.1@180.975,17.4
ROW2: D15.1 D16.1 D17.1 D18.1 D19.1 D20.1 D21.1 D22.1 D23.1 D24.1 D25.1 D26.1 D27.1 D28.1 U1.40 | length 315.5
  Top Layer w0.533: v1(-44.831,12.113) -41.231,8.513 -23.247,8.513 v1(-21.9,7.165)
  Bottom Layer w0.533: D15.1 -40.481,7.603 -44.831,11.953 v1(-44.831,12.113) -45.004,12.113 -46.314,10.803 -46.314,-5.162 -35.939,-15.536 -35.598,-15.878 -34.279,-15.878 -33.938,-15.536 -33.664,-15.263 -32.297,-15.263 U1.40 ; v1(-21.9,7.165) -21.806,7.259 -16.677,7.259 D16.1@-16.669,7.267 ; D16.1 -16.669,6.561 -14.308,4.201 -4.408,4.201 -3.452,3.246 -3.452,0.275 -1.499,-1.678 -0.321,-1.678 -0.301,-1.658 -0.008,-1.658 0,-1.65 D17.1 ; D17.1@0.008,-1.658 0.301,-1.658 0.321,-1.678 18.729,-1.678 18.749,-1.658 19.042,-1.658 D18.1@19.05,-1.65 ; D18.1 D18.1@19.05,-1.65 ; D19.1@38.1,-1.69 19.371,-1.69 19.339,-1.658 19.058,-1.658 D18.1@19.05,-1.65 ; D19.1 38.1,-1.65 38.108,-1.658 38.389,-1.658 38.421,-1.69 56.829,-1.69 56.861,-1.658 57.142,-1.658 D20.1@57.15,-1.65 ; D20.1 D20.1@57.15,-1.65 ; D21.1 D21.1@76.2,-1.65 ; D22.1 D22.1@95.25,-1.65 ; D23.1 D23.1@114.3,-1.65 ; D24.1 D24.1@133.35,-1.65 ; D25.1 D25.1@152.4,-1.65 ; D26.1 D26.1@171.45,-1.65 ; D27.1 D27.1@190.5,-1.65 ; D28.1 214.312,-1.65 214.304,-1.658 214.054,-1.658 214.034,-1.678 190.821,-1.678 190.801,-1.658 190.508,-1.658 D27.1@190.5,-1.65 ; D20.1@57.15,-1.65 57.158,-1.658 57.451,-1.658 57.471,-1.678 75.879,-1.678 75.899,-1.658 76.192,-1.658 D21.1@76.2,-1.65 ; D21.1@76.2,-1.65 76.208,-1.658 76.501,-1.658 76.521,-1.678 94.929,-1.678 94.949,-1.658 95.242,-1.658 D22.1@95.25,-1.65 ; D22.1@95.25,-1.65 95.258,-1.658 95.551,-1.658 95.571,-1.678 113.979,-1.678 113.999,-1.658 114.292,-1.658 D23.1@114.3,-1.65 ; D23.1@114.3,-1.65 114.308,-1.658 114.601,-1.658 114.621,-1.678 133.029,-1.678 133.049,-1.658 133.342,-1.658 D24.1@133.35,-1.65 ; D24.1@133.35,-1.65 133.358,-1.658 133.651,-1.658 133.671,-1.678 152.079,-1.678 152.099,-1.658 152.392,-1.658 D25.1@152.4,-1.65 ; D25.1@152.4,-1.65 152.408,-1.658 152.701,-1.658 152.721,-1.678 171.129,-1.678 171.149,-1.658 171.442,-1.658 D26.1@171.45,-1.65 ; D26.1@171.45,-1.65 171.458,-1.658 171.751,-1.658 171.771,-1.678 190.179,-1.678 190.199,-1.658 190.492,-1.658 D27.1@190.5,-1.65
ROW3: D29.1 D30.1 D31.1 D32.1 D33.1 D34.1 D35.1 D36.1 D37.1 D38.1 D39.1 D40.1 D41.1 U1.39 | length 257.3
  Top Layer w0.533: v1(-28.794,-12.903) -21.261,-20.436 v1(-16.406,-20.436)
  Bottom Layer w0.533: D29.1@-40.481,-20.729 -36.438,-20.729 -34.867,-19.158 -34.867,-17.621 -33.296,-16.05 -31.953,-16.05 U1.39 ; U1.39@-30.039,-14.136 -29.175,-13.271 -29.162,-13.271 v1(-28.794,-12.903) ; v1(-16.406,-20.436) -16.207,-20.436 -15.914,-20.729 -14.608,-20.729 -14.588,-20.708 -14.296,-20.708 -14.287,-20.7 D30.1 ; D30.1@-14.279,-20.708 -13.987,-20.708 -13.967,-20.729 4.442,-20.729 4.462,-20.708 4.754,-20.708 4.763,-20.7 D31.1 ; D31.1@5.014,-20.693 5.049,-20.729 23.492,-20.729 23.512,-20.708 23.804,-20.708 23.812,-20.7 D32.1 ; D32.1@24.064,-20.693 24.099,-20.729 42.542,-20.729 42.562,-20.708 42.854,-20.708 D33.1@42.863,-20.7 ; D34.1 61.913,-20.729 43.183,-20.729 43.163,-20.708 42.871,-20.708 D33.1@42.863,-20.7 ; D34.1@62.164,-20.693 62.199,-20.729 80.642,-20.729 80.662,-20.708 80.954,-20.708 D35.1@80.963,-20.7 ; D35.1 D35.1@80.963,-20.7 ; D36.1 100.013,-20.7 99.984,-20.729 81.283,-20.729 81.263,-20.708 80.971,-20.708 D35.1@80.963,-20.7 ; D36.1@100.072,-20.527 100.273,-20.729 118.742,-20.729 118.762,-20.708 119.054,-20.708 D37.1@119.062,-20.7 ; D37.1 D37.1@119.062,-20.7 ; D38.1 138.112,-20.729 119.383,-20.729 119.363,-20.708 119.071,-20.708 D37.1@119.062,-20.7 ; D38.1@138.141,-20.729 156.842,-20.729 156.862,-20.708 157.154,-20.708 D39.1@157.162,-20.7 ; D39.1 D39.1@157.162,-20.7 ; D40.1 D40.1@176.213,-20.7 ; D41.1 207.169,-20.7 207.16,-20.708 206.869,-20.708 206.848,-20.729 176.533,-20.729 176.513,-20.708 176.221,-20.708 D40.1@176.213,-20.7 ; D33.1@42.863,-20.7 D33.1 D33.1@42.863,-20.7 ; D39.1@157.162,-20.7 157.171,-20.708 157.463,-20.708 157.483,-20.729 175.892,-20.729 175.912,-20.708 176.204,-20.708 D40.1@176.213,-20.7
ROW4: D42.1 D43.1 D44.1 D45.1 D46.1 D47.1 D48.1 D49.1 D50.1 D51.1 D52.1 D53.1 U1.37 | length 271.4
  Bottom Layer w0.533: D42.1 -35.719,-39.75 -35.727,-39.758 -36.02,-39.758 -36.04,-39.778 -37.219,-39.778 -39.172,-37.825 -39.172,-28.03 -31.42,-20.278 -31.42,-19.164 -31.078,-18.823 -31.031,-18.776 -31.031,-17.951 -31.031,-17.391 U1.37 ; -35.418,-39.758 -35.398,-39.778 -5.083,-39.778 -5.063,-39.758 -4.771,-39.758 D43.1@-4.763,-39.75 ; D43.1 D43.1@-4.763,-39.75 ; D44.1 D44.1@14.287,-39.75 ; D45.1 D45.1@33.337,-39.75 ; D46.1 52.388,-39.75 52.379,-39.758 52.087,-39.758 52.067,-39.778 33.658,-39.778 33.638,-39.758 33.346,-39.758 D45.1@33.337,-39.75 ; D46.1@52.416,-39.778 71.117,-39.778 71.137,-39.758 71.429,-39.758 D47.1@71.438,-39.75 ; D47.1 D47.1@71.438,-39.75 ; D48.1 90.488,-39.75 90.479,-39.758 90.187,-39.758 90.167,-39.778 71.758,-39.778 71.738,-39.758 71.446,-39.758 D47.1@71.438,-39.75 ; D48.1@90.516,-39.778 109.217,-39.778 109.237,-39.758 109.529,-39.758 D49.1@109.537,-39.75 ; D49.1 D49.1@109.537,-39.75 ; D50.1 128.588,-39.75 128.579,-39.758 128.287,-39.758 128.267,-39.778 109.858,-39.778 109.838,-39.758 109.546,-39.758 D49.1@109.537,-39.75 ; D50.1@128.616,-39.778 147.317,-39.778 147.337,-39.758 147.629,-39.758 147.637,-39.75 D51.1 ; D51.1@147.666,-39.778 166.367,-39.778 166.387,-39.758 166.679,-39.758 166.688,-39.75 D52.1 ; D52.1@166.716,-39.778 202.085,-39.778 202.105,-39.758 202.398,-39.758 202.406,-39.75 D53.1 ; D43.1@-4.763,-39.75 -4.754,-39.758 -4.462,-39.758 -4.442,-39.778 13.967,-39.778 13.987,-39.758 14.279,-39.758 D44.1@14.287,-39.75 ; D44.1@14.287,-39.75 14.296,-39.758 14.588,-39.758 14.608,-39.778 33.017,-39.778 33.037,-39.758 33.329,-39.758 D45.1@33.337,-39.75
ROW5: D54.1 D55.1 D56.1 D57.1 D58.1 D59.1 D60.1 D61.1 U1.38 | length 305
  Bottom Layer w0.533: U1.38 -31.609,-16.837 -32.97,-16.837 -33.773,-17.64 -33.773,-21.517 -39.959,-27.704 -39.959,-45.453 -42.862,-48.356 D54.1 D55.1 D56.1 23.991,-48.606 24.303,-48.919 24.303,-49.094 25.776,-50.567 27.871,-50.567 29.832,-48.606 D57.1 123.838,-48.606 124.303,-49.072 124.303,-49.094 125.776,-50.567 127.859,-50.567 129.82,-48.606 D58.1 D59.1 D60.1 D61.1
SCLK: J?.4 U1.9 | length 24.3
  Bottom Layer w0.254: U1.9@-28.803,-4.63 -29.301,-4.133 -29.301,-2.948 -28.059,-1.706 -26.473,-1.706 -24.946,-0.18 -24.946,8.391 J?.4
SS: J?.3 U1.8 | length 24.1
  Bottom Layer w0.254: U1.8@-29.322,-5.243 -29.322,-5.163 -29.809,-4.676 -29.809,-2.737 -28.27,-1.198 -26.683,-1.198 -25.46,0.025 -25.46,10.417 J?.3
UCAP: C3.2 U1.6 | length 2.4
  Bottom Layer w0.533: C3.2 -31.011,-5.813 -30.431,-6.392 U1.6
VCC: C4.2 C5.2 C6.2 C7.2 C8.2 J1.1 J?.1 R3.1 U1.2 U1.7 U1.14 U1.24 U1.34 U1.44 | length 130.4
  Top Layer w0.254: v1(-34.925,-5.159) v1@-34.855,-5.23 ; v1@-28.348,-19.129 v1(-28.301,-19.129)
  Top Layer w0.533: -30.078,-5.23 -24.827,-10.48 v1(-22.212,-10.48)
  Top Layer w0.635: v1(-41.162,14.363) -41.125,14.325 -31.443,14.325 v1(-31.406,14.287) ; v1@-28.348,-19.129 -32.759,-14.717 -32.759,-7.325 -34.855,-5.23 -30.078,-5.23 -24.073,-5.23 v1(-19.5,-0.656)
  Bottom Layer w0.254: C5.2 C5.2@-34.441,-10.518 ; v1(-28.301,-19.129) C6.2 -27.34,-18.304 ; C7.2@-22.602,-3.305 C7.2
  Bottom Layer w0.356: -41.211,20.764 -37.875,24.1
  Bottom Layer w0.406: -37.875,24.1 J1.1
  Bottom Layer w0.533: C5.2@-34.441,-10.518 -32.664,-10.518 -31.97,-9.825 -31.97,-9.383 U1.2 ; -34.212,-10.747 U1.44 ; U1.7 -29.861,-5.831 -29.517,-6.175 -29.515,-6.175 -29.294,-6.397 -27.526,-6.397 -26.395,-5.265 -24.569,-5.265 -24.347,-5.043 -24.345,-5.043 -24.001,-4.699 U1.14 C7.2@-22.602,-3.305 ; U1.34@-27.624,-17.388 -27.34,-17.672 -27.34,-18.304 C6.2@-27.34,-18.837 ; C7.2 -22.677,-3.098 -22.677,-2.972 -22.354,-2.649 -22.354,-1.217 -22.125,-0.989 R3.1@-22.125,-0.863 ; R3.1 R3.1@-22.125,-0.863 ; v1(-22.212,-10.48) -20.643,-10.48 ; U1.24 -20.955,-11.347 -20.955,-10.793 -20.643,-10.48 ; v1@-19.795,-0.656 -21.793,-0.656 -22,-0.863 R3.1@-22.125,-0.863 ; C8.2 -20.643,-10.48
  Bottom Layer w0.635: -41.211,20.764 -41.211,14.411 v1(-41.162,14.363) -35.652,8.852 -35.652,3.83 -36.238,3.243 C4.2 ; C4.2@-36.205,-3.153 -36.205,-5.159 ; C5.2 -35.833,-10.518 -36.205,-10.146 -36.205,-5.159 ; v1(-34.925,-5.159) -36.205,-5.159 ; v1(-31.406,14.287) J?.1
XT_N: C2.2 U1.17 Y1.2 | length 21.3
  Bottom Layer w0.533: U1.17 -20.664,-4.761 -16.386,-4.761 -13.578,-1.953 -11.32,-1.953 -9.179,-1.953 -8.867,-2.266 -8.867,-2.998 -8.244,-3.62 Y1.2 -7.863,-2.309 -7.715,-2.16 C2.2
XT_P: C1.2 U1.16 Y1.1 | length 21.9
  Bottom Layer w0.533: U1.16 -22.524,-5.489 -20.995,-3.961 -16.717,-3.961 -13.91,-1.153 -10.988,-1.153 -9.179,-1.153 -8.867,-0.841 -8.867,-0.179 -8.244,0.444 Y1.1 -7.863,-0.868 -7.715,-1.017 C1.2
pads on no net: J1.4 S1. S2. S3. S4. S5. S6. S7. S8. S9. S10. S11. S12. S13. S14. S15. S16. S17. S18. S19. S20. S21. S22. S23. S24. S25. S26. S27. S28. S29. S30. S31. S32. S33. S34. S35. S36. S37. S38. S39. S40. S41. S42. S43. S44. S45. S46. S47. S48. S49. S50. S51. S52. S53. S54. S55. S56. S57. S58. S59. S60. S61. U1.1 U1.12 U1.42

## Polygon pours and split planes (outlines as drawn)
GND on Top Layer "GND_L01_P000" (solid, remove dead copper, pour order 0): -50.982,-65.677 cw(c-50.982,-63.677) -52.982,-63.676 -52.963,27.255 cw(c-50.963,27.254) -50.963,29.254 228.411,29.254 cw(c228.411,27.254) 230.411,27.254 230.411,-63.672 cw(c228.411,-63.672) 228.411,-65.672

## Silkscreen, mask and mechanical layers (free items; w line width, h text height)
Board:
  lines w0.254: -50.963,29.381 ccw(c-50.963,27.254) -53.09,27.255 -53.109,-63.676 ccw(c-50.982,-63.677) -50.982,-65.804 228.411,-65.799 ccw(c228.411,-63.672) 230.538,-63.672 230.538,27.254 ccw(c228.411,27.254) 228.411,29.381 -50.963,29.381 ; -50.963,29.381 -50.963,29.381
Mechanical 2:
  drawing of 323 lines, arcs and shapes, not listed
Mechanical 3:
  the board outline again, w0.013
Mechanical 10:
  the board outline again, w0.254

## Text inside footprints (layer, text, board x,y; h text height)
J?: Bottom Overlay "_RST" at -11.113,12.255 h0.76 r90; Bottom Overlay "VCC" at -26.289,12.255 h0.76 r90; Bottom Overlay "GND" at -23.749,12.255 h0.76 r90; Bottom Overlay "SS" at -21.209,12.255 h0.76 r90; Bottom Overlay "SCLK" at -18.669,12.255 h0.76 r90; Bottom Overlay "MISO" at -13.589,12.255 h0.76 r90; Bottom Overlay "MOSI" at -16.129,12.255 h0.76 r90
U1: Mechanical 4 "MISO" at -26.769,-4.19 h0.3 r135; Mechanical 4 "MOSI" at -27.334,-4.756 h0.3 r135; Mechanical 4 "SCLK" at -27.9,-5.322 h0.3 r135; Mechanical 4 "SS" at -28.466,-5.887 h0.3 r135; Mechanical 4 "VBUS" at -29.031,-6.453 h0.3 r135; Mechanical 4 "UCAP" at -29.597,-7.019 h0.3 r135; Mechanical 4 "UGND" at -30.163,-7.584 h0.3 r135; Mechanical 4 "D+" at -30.728,-8.15 h0.3 r135; Mechanical 4 "D-" at -31.294,-8.716 h0.3 r135; Mechanical 4 "UVCC" at -31.86,-9.281 h0.3 r135; Mechanical 4 "AVCC" at -31.648,-10.3 h0.3 r45; Mechanical 4 "GND" at -31.294,-11.078 h0.3 r45; Mechanical 4 "VCC" at -26.203,-16.169 h0.3 r45; Mechanical 4 "GND" at -26.769,-15.603 h0.3 r45; Mechanical 4 "AREF" at -30.516,-11.431 h0.3 r45; Mechanical 4 "XTAL1" at -22.922,-7.231 h0.3 r45; Mechanical 4 "XTAL2" at -23.488,-6.665 h0.3 r45; Mechanical 4 "GND" at -24.053,-6.099 h0.3 r45; Mechanical 4 "VCC" at -24.619,-5.534 h0.3 r45; Mechanical 4 "RESET_" at -25.202,-4.95 h0.3 r45; Mechanical 4 "AVCC" at -21.437,-10.653 h0.3 r135; Mechanical 4 "GND" at -20.659,-10.3 h0.3 r135